# Altium PCB GbE_Interface_Adapter.PcbDoc (part 2 of 2)
Units mm, origin at the board's own origin, x right, y up, seen from the top; angles counter-clockwise.
Board outline 70.72 x 41.02 mm, 4 copper layers (Top Layer, GND, PWR/GND, Bottom Layer), stack 1.583 mm thick; 95 components, 56 nets, 318 pads, 400 vias.
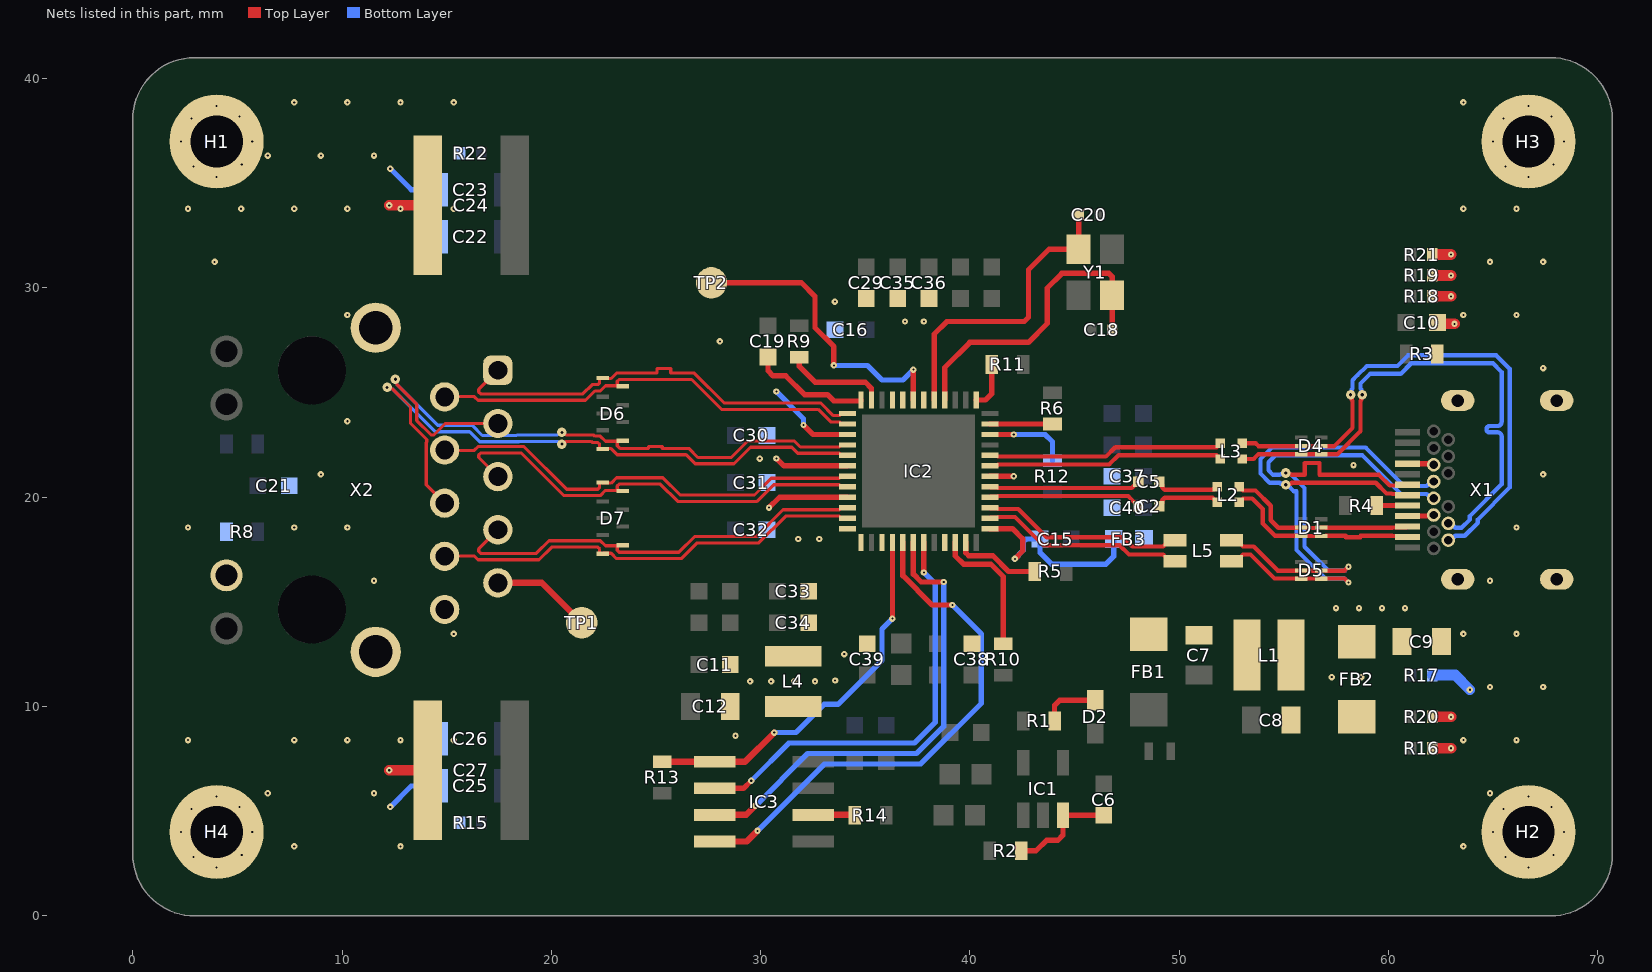
[diagram p4: the nets of this part, all layers, seen from the top]

## Via types
v1: diameter 0.305, hole 0.102, Top Layer to Bottom Layer, tented both sides, 391 vias
v2: diameter 0.457, hole 0.152, Top Layer to Bottom Layer, tented both sides, 9 vias

## Nets (pads, with @x,y where several pads share a name; then routed paths per layer and width w, separated by ;. In a path a pad name is that pad's centre, name@x,y a point inside that pad or via, vN(x,y) a via of type N, cw(c..) or ccw(c..) an arc to the next point about the centre after c; other vN are vias at no path point) (continued)
NetC6_2: C6.2 IC1.3 R2.1 | length 5.2
  Top Layer w0.254: R2.1@42.45,3.1 43.161,3.1 43.662,3.6 44.2,3.6 44.45,3.85 IC1.3@44.45,4.8 C6.2@46.4,4.8
NetC7_2: C7.2 FB1.2 L1.1
NetC8_2: C8.2 FB2.1 L1.2
NetC15_2: C15.2 FB3.1 IC2.25 | length 10.1
  Top Layer w0.254: IC2.25@40.954,18.5 42.039,18.5 42.531,18.008 42.531,17.431 v1(42.15,17.05)
  Bottom Layer w0.254: v1(42.15,17.05) 42.55,17.45 42.55,17.851 42.699,18 C15.2@43.35,18 43.35,17.35 43.9,16.8 46.5,16.8 46.875,17.175 FB3.1@46.875,18
NetC18_1: C18.1 IC2.40 Y1.1 | length 15
  Top Layer w0.254: IC2.40@38.8,24.654 38.8,26.2 40,27.4 42.8,27.4 43.7,28.3 43.7,30 44.4,30.7 46.651,30.7 46.8,30.551 Y1.1@46.8,29.65 C18.1@46.8,28
NetC19_2: C19.2 IC2.48 | length 5.8
  Top Layer w0.254: C19.2@30.35,26.7 30.35,26.05 30.6,25.8 31.2,25.8 32.1,24.9 33.2,24.9 33.5,24.6 34.8,24.6 IC2.48@34.8,24.654
NetC20_1: C20.1 IC2.41 Y1.3 | length 14.7
  Top Layer w0.254: IC2.41@38.3,24.654 38.3,27.8 38.9,28.4 42.6,28.4 42.8,28.6 42.8,30.87 43.78,31.85 Y1.3@45.2,31.85 C20.1@45.2,33.5
NetD2_2: D2.2 R1.1 | length 2.8
  Top Layer w0.254: R1.1@44.05,9.305 44.05,10.05 44.3,10.3 D2.2@46,10.3
NetIC2_17: IC2.17 IC3.4 | length 25.3
  Top Layer w0.254: IC2.17@36.8,17.846 36.8,16.251 38.201,14.85 v1(39.163,14.85)
  Top Layer w0.305: IC3.4@27.8,3.545 29.345,3.545 v1(29.85,4.05)
  Bottom Layer w0.254: v1(29.85,4.05) 33.05,7.25 37.65,7.25 40.55,10.15 40.55,13.463 v1(39.163,14.85)
NetIC2_18: IC2.18 IC3.3 | length 22.7
  Top Layer w0.254: IC2.18@37.3,17.846 37.3,16.325 37.675,15.95 v1(38.75,15.95)
  Top Layer w0.305: IC3.3@27.8,4.815 29.315,4.815 v1(29.75,5.25)
  Bottom Layer w0.254: v1(29.75,5.25) 32.25,7.75 37.45,7.75 38.756,9.056 38.756,15.944 v1(38.75,15.95)
NetIC2_19: IC2.19 IC3.2 | length 20.7
  Top Layer w0.254: IC3.2@27.8,6.085 29.185,6.085 v1(29.55,6.45) ; v1(37.8,16.4) IC2.19@37.8,17.846
  Bottom Layer w0.254: v1(29.55,6.45) 31.35,8.25 37.35,8.25 38.35,9.25 38.35,15.85 v1(37.8,16.4)
NetR4_2: R4.2 X1.A5 | length 1.5
  Top Layer w0.254: R4.2@59.45,19.6 X1.A5@60.92,19.6
NetR5_1: IC2.23 R5.1 | length 4.2
  Top Layer w0.254: IC2.23@39.8,17.846 39.8,17.349 39.949,17.2 41.103,17.2 41.853,16.45 R5.1@43.1,16.45
NetR6_1: IC2.35 R6.1 | length 3
  Top Layer w0.254: IC2.35@40.954,23.5 R6.1@43.95,23.5
NetR8_2: R8.2 X2.P13
NetR9_1: IC2.47 R9.1 | length 4.9
  Top Layer w0.254: R9.1@31.85,26.7 31.85,26.249 32.599,25.5 35.003,25.5 35.3,25.203 IC2.47@35.3,24.654
NetR13_2: IC2.16 IC3.1 R13.2 | length 18.4
  Top Layer w0.254: v1(36.3,14.2) IC2.16@36.3,17.846
  Top Layer w0.305: R13.2@25.3,7.355 IC3.1@27.8,7.355 29.255,7.355 v1(30.65,8.75)
  Bottom Layer w0.254: v1(30.65,8.75) 31.691,8.75 33.041,10.1 33.7,10.1 35.8,12.2 35.8,13.7 v1(36.3,14.2)
NetR14_2: IC3.6 R14.2 | length 2
  Top Layer w0.305: IC3.6@32.524,4.815 R14.2@34.5,4.815
PHY_AVDD: TP1.TP X2.P9 | length 4.8
  Top Layer w0.305: X2.P9@17.44,15.905 19.545,15.905 TP1.TP@21.45,14
PME_MODE: IC2.43 TP2.TP | length 14.6
  Top Layer w0.254: TP2.TP@27.65,30.25 31.95,30.25 32.6,29.6 32.6,28.1 33.5,27.2 v1(33.5,26.3) ; IC2.43@37.3,24.654 v1(37.3,26.1)
  Bottom Layer w0.254: v1(33.5,26.3) 35.1,26.3 35.8,25.6 36.8,25.6 v1(37.3,26.1)
PME_N/CONNECT: IC2.22 R10.2 | length 6.6
  Top Layer w0.254: IC2.22@39.3,17.846 39.3,17.2 39.7,16.8 41,16.8 41.6,16.2 R10.2@41.6,13
SHIELD: C21.1 C22.2 C23.2 C24.2 C25.2 C26.2 C27.2 H1.H H4.H R15.2 R22.2 X2.P10 X2.S1 X2.S2 | length 9.1
  Top Layer w0.508: v1(12.248,6.95) C27.2@14.098,6.95 ; v1(12.25,33.95) C24.2@14.1,33.95
  Bottom Layer w0.254: v1(12.3,5.2) 13.3,6.2 C25.2@14.6,6.2 ; v1(12.3,35.7) 13.3,34.7 C23.2@14.6,34.7
  other v1: 4,2.3 2.9,2.8 5.2,2.9 7.71,3.31 12.79,3.31 2.3,4 5.7,4 2.8,5.1 5.1,5.2 4,5.7 6.44,5.85 11.52,5.85 2.63,8.39 7.71,8.39 10.25,8.39 12.79,8.39 15.33,8.39 15.33,13.47 11.52,16.01 2.63,18.55 7.71,18.55 10.25,18.55 8.98,21.09 10.25,23.63 10.25,28.71 3.9,31.25 2.63,33.79 5.17,33.79 7.71,33.79 10.25,33.79 12.79,33.79 15.33,33.79 4,35.3 2.9,35.8 5.2,35.9 6.44,36.33 8.98,36.33 11.52,36.33 2.3,37 5.7,37 2.8,38.1 5.1,38.2 4,38.7 7.71,38.87 10.25,38.87 12.79,38.87 15.33,38.87
SHIELD_USB: C9.1 C10.1 H2.H H3.H R3.1 R16.1 R17.1 R18.1 R19.1 R20.2 R21.2 X1.SH1 X1.SH2 X1.SH3 X1.SH4 | length 7.5
  Top Layer w0.508: R16.1@62.1,8 v1(63,8) ; R20.2@62.1,9.5 v1(63,9.5) ; R18.1@62.1,29.6 v1(63,29.6) ; R19.1@62.1,30.6 v1(63,30.6) ; R21.2@62.1,31.6 v1(63,31.6) ; C10.1@62.266,28.284 v1(63.166,28.284)
  Bottom Layer w0.508: R17.1@62.1,11.5 63.2,11.5 v1(63.9,10.8)
  other v1: 66.7,2.3 65.6,2.8 67.9,2.9 63.59,3.31 65,4 68.4,4 65.5,5.1 67.8,5.2 66.7,5.7 64.86,5.85 63.59,8.39 66.13,8.39 64.86,10.93 67.4,10.93 63.59,13.47 66.13,13.47 64.86,16.01 66.13,18.55 67.4,21.09 67.4,26.17 63.59,28.71 66.13,28.71 64.86,31.25 67.4,31.25 63.59,33.79 66.13,33.79 66.7,35.3 65.6,35.8 67.9,35.9 65,37 68.4,37 65.5,38.1 67.8,38.2 66.7,38.7 63.59,38.87
TEST: IC2.34 R12.2 | length 4
  Top Layer w0.254: IC2.34@40.954,23 v1(42.1,23)
  Bottom Layer w0.254: v1(42.1,23) 43.6,23 43.95,22.65 R12.2@43.95,21.75
TR0_N: D6.9 IC2.2 X2.P2 | length 21
  Top Layer w0.152: X2.P2@14.9,24.795 14.915,24.81 16.311,24.81 16.49,24.632 21.63,24.632 22.076,25.078 22.341,25.078 22.587,25.324 D6.9@23.176,25.324 ; D6.9@23.4,25.3 23.2,25.3 D6.9@23.176,25.324 ; IC2.2@34.146,23.5 33.867,23.5 33.769,23.598 33.351,23.598 32.748,24.2 28.131,24.2 26.702,25.629 23.238,25.629 23.149,25.539 23.149,25.413 23.176,25.386 D6.9@23.176,25.324
TR0_P: D6.1 IC2.1 X2.P1 | length 21
  Top Layer w0.152: X2.P1@17.44,26.065 16.527,25.152 16.527,25.026 16.616,24.936 21.504,24.936 21.95,25.383 22.215,25.383 22.304,25.472 22.304,25.676 22.328,25.7 D6.1@22.45,25.7 22.474,25.676 22.855,25.676 23.112,25.933 24.97,25.933 25.046,25.933 25.046,26.158 25.707,26.158 25.707,25.933 25.937,25.933 26.829,25.933 28.257,24.505 32.874,24.505 33.477,23.902 33.769,23.902 33.867,24 IC2.1@34.146,24
TR1_N: D6.5 IC2.5 X2.P6 | length 31.1
  Top Layer w0.152: v2(12.147,25.247) 12.206,25.189 12.385,25.189 13.263,24.311 13.263,23.534 14.037,22.76 14.037,22.634 14.022,22.619 14.022,20.593 X2.P6@14.9,19.715 ; v2(20.5,22.541) 20.582,22.541 20.709,22.668 21.899,22.668 21.95,22.617 22.215,22.617 22.304,22.528 22.304,22.324 22.328,22.3 D6.5@22.45,22.3 22.474,22.324 22.855,22.324 23.148,22.03 26.439,22.03 26.874,21.595 28.726,21.595 29.516,22.384 31.485,22.384 31.772,22.098 33.769,22.098 33.867,22 IC2.5@34.146,22
  Bottom Layer w0.152: v2(12.147,25.247) 12.206,25.189 12.385,25.189 14.442,23.133 16.088,23.133 16.574,22.647 18.456,22.647 18.477,22.668 20.291,22.668 20.418,22.541 v2(20.5,22.541)
TR1_P: D6.6 IC2.4 X2.P3 | length 31
  Top Layer w0.152: v2(12.543,25.643) 12.601,25.584 12.601,25.405 13.568,24.437 13.568,23.66 14.253,22.975 14.379,22.975 14.929,23.525 X2.P3@17.44,23.525 ; v2(20.5,23.1) 20.582,23.1 20.709,22.973 22.026,22.973 22.076,22.922 22.341,22.922 22.587,22.676 D6.6@23.176,22.676 ; D6.6@23.4,22.7 23.2,22.7 D6.6@23.176,22.676 ; IC2.4@34.146,22.5 33.867,22.5 33.769,22.402 31.899,22.402 31.612,22.689 29.389,22.689 28.6,21.9 27.052,21.9 27,21.9 26.565,22.335 26.215,22.335 26.036,22.335 25.299,22.335 25.299,22.431 24.639,22.431 24.639,22.335 24.4,22.335 23.274,22.335 23.149,22.461 23.149,22.587 23.176,22.614 D6.6@23.176,22.676
  Bottom Layer w0.152: v2(12.543,25.643) 12.601,25.584 12.601,25.405 14.568,23.438 16.214,23.438 16.7,22.952 18.33,22.952 18.351,22.973 20.291,22.973
TR2_N: D7.9 IC2.8 X2.P5 | length 21.3
  Top Layer w0.152: X2.P5@17.44,20.985 16.527,21.898 16.527,22.024 16.616,22.114 18.565,22.114 20.601,20.078 22.341,20.078 22.587,20.324 D7.9@23.176,20.324 ; D7.9@23.4,20.3 23.2,20.3 D7.9@23.176,20.324 ; IC2.8@34.146,20.5 33.867,20.5 33.769,20.598 30.631,20.598 29.833,19.8 26.031,19.8 25.202,20.629 23.238,20.629 23.149,20.539 23.149,20.413 23.176,20.386 D7.9@23.176,20.324
TR2_P: D7.1 IC2.7 X2.P4 | length 21.3
  Top Layer w0.152: X2.P4@14.9,22.255 14.915,22.24 16.311,22.24 16.49,22.418 18.691,22.418 20.727,20.383 22.215,20.383 22.304,20.472 22.304,20.676 22.328,20.7 D7.1@22.45,20.7 22.474,20.676 22.855,20.676 23.112,20.933 25.329,20.933 26.157,20.105 29.707,20.105 30.504,20.902 33.769,20.902 33.867,21 IC2.7@34.146,21
TR3_N: D7.5 IC2.11 X2.P8 | length 20.8
  Top Layer w0.152: X2.P8@14.9,17.175 14.915,17.19 16.311,17.19 16.49,17.012 19.406,17.012 20.012,17.617 22.215,17.617 22.304,17.528 22.304,17.324 22.328,17.3 D7.5@22.45,17.3 22.474,17.324 22.855,17.324 23.112,17.067 26.215,17.067 26.964,17.815 29.913,17.815 31.196,19.098 33.769,19.098 33.867,19 IC2.11@34.146,19
TR3_P: D7.6 IC2.10 X2.P7 | length 20.8
  Top Layer w0.152: X2.P7@17.44,18.445 16.527,17.532 16.527,17.406 16.616,17.316 19.28,17.316 19.886,17.922 22.341,17.922 22.587,17.676 D7.6@23.176,17.676 ; D7.6@23.4,17.7 23.2,17.7 D7.6@23.176,17.676 ; IC2.10@34.146,19.5 33.867,19.5 33.769,19.402 31.069,19.402 29.787,18.12 26.837,18.12 26.089,17.371 23.238,17.371 23.149,17.461 23.149,17.587 23.176,17.614 D7.6@23.176,17.676
USB2D1_N: D5.2 D5.5 L5.4 X1.A7 X1.B7 | length 30.1
  Top Layer w0.203: L5.4@52.5,17.95 52.75,17.95 53.059,17.641 53.567,17.641 54.717,16.491 55.644,16.491 55.653,16.5 D5.5@55.85,16.5 56.047,16.5 56.056,16.491 56.594,16.491 56.603,16.5 D5.2@56.8,16.5 56.997,16.5 57.006,16.491 57.916,16.491 v1(58.1,16.675) ; 55.344,21.11 55.384,21.07 55.9,21.07 56.002,21.07 56.002,21.639 56.713,21.639 56.713,21.07 57.5,21.07 59.556,21.07 60.071,20.555 60.875,20.555 X1.A7@60.92,20.6
  Bottom Layer w0.203: v1(58.1,16.675) 57.916,16.491 57.143,16.491 56,17.633 56,20.439 55.329,21.11 55.149,21.11 v2(55.1,21.159) 55.051,21.11 54.856,21.11 54.816,21.07 54.488,21.07 54.269,21.288 54.269,21.669 54.6,22 58.761,22 60.602,20.16 61.84,20.16 62.049,19.95 X1.B7@62.17,19.95
USB2D1_P: D5.1 D5.6 L5.1 X1.A6 X1.B6 | length 30.2
  Top Layer w0.203: L5.1@52.5,16.95 52.75,16.95 53.06,17.26 53.409,17.26 54.559,16.11 55.644,16.11 55.653,16.1 D5.6@55.85,16.1 56.047,16.1 56.056,16.11 56.594,16.11 56.603,16.1 D5.1@56.8,16.1 56.997,16.1 57.006,16.11 57.916,16.11 v1(58.1,15.925) ; 55.344,20.649 55.384,20.689 59.398,20.689 59.914,20.174 60.165,20.174 60.191,20.148 60.872,20.148 X1.A6@60.92,20.1
  Bottom Layer w0.203: v1(58.1,15.925) 57.916,16.11 56.985,16.11 55.619,17.475 55.619,20.281 55.488,20.281 55.169,20.6 v2(55.1,20.6) 55.051,20.649 54.856,20.649 54.816,20.689 54.33,20.689 53.888,21.131 53.888,21.827 54.442,22.381 58.919,22.381 60.759,20.541 61.84,20.541 62.049,20.75 X1.B6@62.17,20.75
USB2D_N: IC2.27 L5.3 | length 9.7
  Top Layer w0.203: IC2.27@40.954,19.5 40.979,19.475 41.309,19.475 41.343,19.441 42.314,19.441 43.674,18.081 47.321,18.081 47.762,17.641 49.24,17.641 49.55,17.95 L5.3@49.8,17.95
USB2D_P: IC2.26 L5.2 | length 9.7
  Top Layer w0.203: IC2.26@40.954,19 40.979,19.025 41.309,19.025 41.343,19.06 42.157,19.06 43.516,17.7 47.163,17.7 47.604,17.26 49.24,17.26 49.55,16.95 L5.2@49.8,16.95
USB3RX1_N: D4.2 D4.5 L3.4 X1.B11 | length 25.8
  Top Layer w0.203: L3.4@53.025,22.575 53.666,22.575 53.8,22.441 55.644,22.441 55.653,22.45 D4.5@55.85,22.45 56.047,22.45 56.056,22.441 56.594,22.441 56.603,22.45 D4.2@56.8,22.45 56.997,22.45 57.016,22.431 57.405,22.431 58.289,23.315 58.289,24.616 58.249,24.656 58.249,24.851 v2(58.2,24.9)
  Bottom Layer w0.203: 58.249,25.144 58.289,25.184 58.289,25.591 58.511,25.813 58.975,26.277 60.438,26.277 60.942,26.781 65.158,26.781 65.8,26.139 65.8,20.46 64.281,18.941 64.281,18.783 63.658,18.16 63.2,18.16 62.991,17.95 X1.B11@62.87,17.95
USB3RX1_P: D4.1 D4.6 L3.1 X1.B10 | length 25.7
  Top Layer w0.203: L3.1@53.025,21.825 53.565,21.825 53.8,22.06 55.644,22.06 55.653,22.05 D4.6@55.85,22.05 56.047,22.05 56.056,22.06 56.594,22.06 56.603,22.05 D4.1@56.8,22.05 57.563,22.05 58.67,23.157 58.67,24.616 58.71,24.656 58.71,24.851 v2(58.759,24.9)
  Bottom Layer w0.203: 58.71,25.144 58.67,25.184 58.67,25.433 59.133,25.896 60.596,25.896 61.1,26.4 65,26.4 65.419,25.981 65.419,24.623 65.419,23.607 cw(c65.216,23.607) 65.216,23.404 64.844,23.404 ccw(c64.844,23.252) 64.844,23.099 65.216,23.099 cw(c65.216,22.896) 65.419,22.896 65.419,22.177 65.419,20.618 63.9,19.099 63.9,18.941 63.5,18.541 63.2,18.541 62.991,18.75 X1.B10@62.87,18.75
USB3RX_N: IC2.32 L3.3 | length 11.3
  Top Layer w0.203: IC2.32@40.954,22 40.979,21.975 41.309,21.975 41.343,21.941 46.502,21.941 46.952,22.39 51.79,22.39 L3.3@51.975,22.575
USB3RX_P: IC2.31 L3.2 | length 11.3
  Top Layer w0.203: IC2.31@40.954,21.5 40.979,21.525 41.309,21.525 41.343,21.56 46.66,21.56 47.109,22.009 51.79,22.009 L3.2@51.975,21.825
USB3TX1_N: D1.2 D1.5 L2.4 X1.A3 | length 9.3
  Top Layer w0.203: L2.4@52.875,20.5 53.059,20.316 53.658,20.316 54.381,19.592 54.381,18.9 54.741,18.541 55.644,18.541 55.653,18.55 D1.5@55.85,18.55 56.047,18.55 56.066,18.531 56.376,18.531 56.584,18.531 56.603,18.55 D1.2@56.8,18.55 56.997,18.55 57.006,18.541 60.179,18.541 60.191,18.552 60.872,18.552 X1.A3@60.92,18.6
USB3TX1_P: D1.1 D1.6 L2.1 X1.A2 | length 9.2
  Top Layer w0.203: L2.1@52.875,19.75 53.059,19.935 53.5,19.935 54,19.435 54,18.742 54.583,18.16 55.644,18.16 55.653,18.15 D1.6@55.85,18.15 56.218,18.15 D1.1@56.602,18.15 ; D1.1@56.8,18.15 56.997,18.15 57.006,18.16 57.153,18.16 57.966,18.16 57.966,18.084 58.677,18.084 58.677,18.16 58.902,18.16 60.179,18.16 60.191,18.148 60.872,18.148 X1.A2@60.92,18.1
USB3TX2_N: C5.1 L2.3 | length 3.1
  Top Layer w0.203: C5.1@49.05,20.75 49.198,20.602 49.198,20.472 49.317,20.353 51.583,20.353 51.606,20.377 51.702,20.377 L2.3@51.825,20.5
USB3TX2_P: C2.1 L2.2 | length 3.1
  Top Layer w0.203: C2.1@49.05,19.575 49.198,19.723 49.198,19.853 49.317,19.972 51.603,19.972 L2.2@51.825,19.75
USB3TX_N: C5.2 IC2.29 | length 7.2
  Top Layer w0.203: IC2.29@40.954,20.5 40.979,20.475 41.309,20.475 41.343,20.441 47.74,20.441 C5.2@48.05,20.75
USB3TX_P: C2.2 IC2.28 | length 7.3
  Top Layer w0.203: IC2.28@40.954,20 40.979,20.025 41.309,20.025 41.343,20.06 47.565,20.06 C2.2@48.05,19.575
USERBIAS: IC2.37 R11.2 | length 2.3
  Top Layer w0.254: IC2.37@40.3,24.654 40.3,24.65 40.75,24.65 41.05,24.95 R11.2@41.05,26.35
VBUS: C9.2 FB2.2 X1.A4 X1.A9 X1.B4 X1.B9 | length 2.5
  Top Layer w0.254: X1.A4@60.92,19.1 62.12,19.1 X1.B9@62.17,19.15 ; X1.A9@60.92,21.6 62.12,21.6 X1.B4@62.17,21.55
  other v1: 57.3,11.4 58.7,11.4 57.5,14.7 58.6,14.7 59.7,14.7 60.8,14.7 58.336,21.536
VDD12: C11.2 C12.2 C35.2 C36.2 C37.2 C38.2 C39.2 C40.2 FB3.2 IC2.15 IC2.21 IC2.30 IC2.42 IC2.44 L4.2 | length 1.1
  Top Layer w0.254: IC2.30@40.954,21 v1(42.1,21)
  other v1: 28.8,8.6 29.5,11.2 30.5,11.2 31.6,11.2 32.6,11.2 33.563,11.237 34,12.5 36.9,28.4 37.8,28.4
VDD12_SW_OUT: IC2.13 L4.1
VDD25: C16.2 C29.2 C30.2 C31.2 C32.2 C33.2 C34.2 IC2.3 IC2.6 IC2.9 IC2.12 IC2.45 | length 11.9
  Top Layer w0.254: v1(30.4,19.5) 30.9,20 IC2.9@34.146,20 ; v1(30.75,21.85) 30.764,21.85 31.114,21.5 IC2.6@34.146,21.5 ; v1(32.05,23.45) 32.5,23 IC2.3@34.146,23
  Bottom Layer w0.254: v1(30.75,25.05) 32.05,23.75 v1(32.05,23.45)
  other v1: 31.8,18 32.8,18 29.956,21.845 28.05,27.45 33.55,29.35
pads on no net: D1.4 D4.4 D5.4 D6.2 D6.4 D6.7 D6.8 D7.2 D7.4 D7.7 D7.8 IC1.4 IC3.7 X1.A8 X1.A10 X1.A11 X1.B2 X1.B3 X1.B5 X1.B8 X2.MH1 X2.MH2 X2.P11

## Polygon pours and split planes (outlines as drawn)
GND on Bottom Layer "GND_L04_P005" (solid, remove dead copper, pour order 5): 16.4,13.1 17.1,13.8 17.1,15.1 15.9,16.3 14.493,16.3 11.5,19.293 11.5,25.1 16.4,30 16.4,41 61.4,41 61.4,24.471 62.329,24.471 63.8,23 63.8,17.9 63.449,17.549 62.544,17.549 61.305,16.311 61.305,15.395 61.998,14.702 61.998,14.098 61.5,13.6 61.5,0 16.4,0
SHIELD_USB on Bottom Layer "SHIELD_USB_L04_P002" (solid, remove dead copper, pour order 2): 61.6,0 61.6,13.7 62.1,14.2 62.1,14.8 61.4,15.5 61.4,16.3 62.6,17.5 63.6,17.5 64,17.9 64,23 62.4,24.6 61.8,24.6 61.8,41 67.848,41 cw(c67.848,38.46) 69.644,40.256 69.956,39.944 cw(c68.16,38.148) 70.7,38.148 70.7,2.752 cw(c68.16,2.752) 69.956,0.956 69.744,0.744 cw(c67.948,2.54) 67.948,0
SHIELD on Bottom Layer "SHIELD_L04_P000" (solid, remove dead copper, pour order 0): 16.2,41 2.752,41 ccw(c2.752,38.46) 0.956,40.256 0.744,40.044 ccw(c2.54,38.248) 0,38.248 0,2.752 ccw(c2.54,2.752) 0.744,0.956 1.1,0.6 ccw(c2.549,2.049) 2.549,0 16.2,0 16.2,13.2 16.9,13.9 16.9,15 15.7,16.2 14.4,16.2 11.3,19.3 11.3,25.2 16.2,30.1
GND on Top Layer "GND_L01_P006" (solid, remove dead copper, pour order 6): 15.592,13.108 16.292,13.808 16.292,15.108 15.092,16.308 13.685,16.308 10.692,19.302 10.692,25.108 15.592,30.008 15.592,41.008 60.592,41.008 60.592,24.479 61.421,24.479 62.6,23.3 62.6,17.506 60.497,15.403 61.19,14.71 61.19,14.107 60.692,13.608 60.692,0.008 15.592,0.008
SHIELD_USB on Top Layer "SHIELD_USB_L01_P003" (solid, remove dead copper, pour order 3): 61.6,0 61.6,13.7 62.1,14.2 62.1,14.8 61.4,15.5 61.4,16.1 62.5,17.2 63.3,17.2 64,17.9 64,23 62.4,24.6 61.8,24.6 61.8,41 67.848,41 cw(c67.848,38.46) 69.644,40.256 69.956,39.944 cw(c68.16,38.148) 70.7,38.148 70.7,2.752 cw(c68.16,2.752) 69.956,0.956 69.744,0.744 cw(c67.948,2.54) 67.948,0
SHIELD on Top Layer "SHIELD_L01_P001" (solid, remove dead copper, pour order 1): 16.2,41 2.752,41 ccw(c2.752,38.46) 0.956,40.256 0.744,40.044 ccw(c2.54,38.248) 0,38.248 0,2.752 ccw(c2.54,2.752) 0.744,0.956 1.1,0.6 ccw(c2.549,2.049) 2.549,0 16.2,0 16.2,13.2 16.9,13.9 16.9,15 15.7,16.2 14.4,16.2 11.3,19.3 11.3,25.2 16.2,30.1
GND on PWR/GND (split plane): 2.95,40.501 67.75,40.501 67.766,40.503 67.964,40.494 68.176,40.466 68.385,40.42 68.589,40.355 68.787,40.273 68.977,40.175 69.157,40.06 69.327,39.929 69.485,39.785 69.629,39.627 69.76,39.457 69.875,39.277 69.973,39.087 70.055,38.889 70.12,38.685 70.166,38.476 70.194,38.264 70.203,38.066 70.201,38.05 70.201,2.95 70.203,2.934 70.194,2.736 70.166,2.524 70.12,2.315 70.055,2.111 69.973,1.913 69.875,1.723 69.76,1.543 69.629,1.373 69.485,1.215 69.327,1.071 69.157,0.94 68.977,0.825 68.787,0.727 68.589,0.645 68.385,0.58 68.176,0.534 67.964,0.506 67.766,0.497 67.75,0.499 2.95,0.499 2.934,0.497 2.736,0.506 2.524,0.534 2.315,0.58 2.111,0.645 1.913,0.727 1.723,0.825 1.543,0.94 1.373,1.071 1.215,1.215 1.071,1.373 0.94,1.543 0.825,1.723 0.727,1.913 0.645,2.111 0.58,2.315 0.534,2.524 0.506,2.736 0.497,2.934 0.499,2.95 0.499,38.05 0.497,38.066 0.506,38.264 0.534,38.476 0.58,38.685 0.645,38.889 0.727,39.087 0.825,39.277 0.94,39.457 1.071,39.627 1.215,39.785 1.373,39.929 1.543,40.06 1.723,40.175 1.913,40.273 2.111,40.355 2.315,40.42 2.524,40.466 2.736,40.494 2.934,40.503
VDD12 on PWR/GND (split plane): 38.296,30.8 38.296,25 38.304,24.96 38.327,24.927 38.36,24.904 38.4,24.896 41.257,24.896 42.496,23.657 42.496,20.404 40.452,20.404 40.452,24.05 40.444,24.089 40.422,24.122 40.389,24.144 40.35,24.152 36.502,24.152 36.502,26.092 36.504,26.1 36.504,27.1 36.496,27.14 36.484,27.156 36.473,27.173 36.355,27.292 36.355,30.8 36.347,30.84 36.324,30.873 36.291,30.896 36.251,30.904 28.2,30.904 28.16,30.896 28.127,30.873 26.127,28.873 26.104,28.84 26.096,28.8 26.096,18.493 25.227,17.623 25.204,17.59 25.196,17.55 25.196,12.75 25.204,12.71 25.227,12.677 25.26,12.654 25.3,12.646 33.35,12.646 33.39,12.654 33.423,12.677 33.446,12.71 33.454,12.75 33.454,13.096 35.246,13.096 35.246,10.104 29.55,10.104 29.51,10.096 29.477,10.073 29.454,10.04 29.446,10 29.446,8.404 25.443,8.404 24.604,9.243 24.604,30.057 26.393,31.846 38.296,31.846
+5V on PWR/GND (split plane): 49.798,1.702 39.802,1.702 39.802,5.198 45.7,5.198 45.739,5.206 45.772,5.228 45.794,5.261 45.802,5.3 45.802,11.998 49.798,11.998
VDD25 on PWR/GND (split plane): 34.196,28.504 33.3,28.504 33.26,28.496 33.227,28.473 33.204,28.44 33.196,28.4 33.196,17.554 29.552,17.554 29.552,25.05 29.544,25.089 29.522,25.122 27.502,27.142 27.502,27.808 29.491,29.796 34.196,29.796
+3V3 on PWR/GND (split plane): 42.798,28.7 42.806,28.661 42.828,28.628 46.698,24.758 46.698,24.4 46.698,16.045 44.357,13.704 39.25,13.704 39.21,13.696 39.177,13.673 39.154,13.64 39.146,13.6 39.146,12.15 39.154,12.11 39.177,12.077 39.21,12.054 39.25,12.046 43.196,12.046 43.196,6.304 32.304,6.304 32.304,9.396 36.9,9.396 36.94,9.404 36.973,9.427 36.996,9.46 37.004,9.5 37.004,14.7 36.996,14.74 36.973,14.773 36.94,14.796 36.9,14.804 36.892,14.802 34.702,14.802 34.702,16.092 34.704,16.1 34.696,16.14 34.673,16.173 34.64,16.196 34.6,16.204 27.7,16.204 27.66,16.196 27.627,16.173 27.357,15.904 26.054,15.904 26.054,17.496 27.257,17.496 27.777,16.977 27.794,16.966 27.81,16.954 27.85,16.946 44,16.946 44.04,16.954 44.073,16.977 44.096,17.01 44.104,17.05 44.104,24.9 44.096,24.94 44.084,24.956 44.073,24.973 41.304,27.743 41.304,30.198 42.798,30.198
SHIELD on GND (split plane): 2.95,40.501 15.948,40.501 15.948,30.204 11.122,25.378 11.082,25.326 11.056,25.265 11.048,25.2 11.048,19.3 11.056,19.235 11.082,19.174 11.122,19.122 14.222,16.022 14.274,15.982 14.335,15.956 14.4,15.948 15.596,15.948 16.648,14.896 16.648,14.004 16.022,13.378 15.982,13.326 15.956,13.265 15.948,13.2 15.948,0.499 2.95,0.499 2.934,0.497 2.736,0.506 2.524,0.534 2.315,0.58 2.111,0.645 1.913,0.727 1.723,0.825 1.543,0.94 1.373,1.071 1.215,1.215 1.071,1.373 0.94,1.543 0.825,1.723 0.727,1.913 0.645,2.111 0.58,2.315 0.534,2.524 0.506,2.736 0.497,2.934 0.499,2.95 0.499,38.05 0.497,38.066 0.506,38.264 0.534,38.476 0.58,38.685 0.645,38.889 0.727,39.087 0.825,39.277 0.94,39.457 1.071,39.627 1.215,39.785 1.373,39.929 1.543,40.06 1.723,40.175 1.913,40.273 2.111,40.355 2.315,40.42 2.524,40.466 2.736,40.494 2.934,40.503
SHIELD_USB on GND (split plane): 67.964,40.494 68.176,40.466 68.385,40.42 68.589,40.355 68.787,40.273 68.977,40.175 69.157,40.06 69.327,39.929 69.485,39.785 69.629,39.627 69.76,39.457 69.875,39.277 69.973,39.087 70.055,38.889 70.12,38.685 70.166,38.476 70.194,38.264 70.203,38.066 70.201,38.05 70.201,2.95 70.203,2.934 70.194,2.736 70.166,2.524 70.12,2.315 70.055,2.111 69.973,1.913 69.875,1.723 69.76,1.543 69.629,1.373 69.485,1.215 69.327,1.071 69.157,0.94 68.977,0.825 68.787,0.727 68.589,0.645 68.385,0.58 68.176,0.534 67.964,0.506 67.766,0.497 67.75,0.499 61.852,0.499 61.852,13.596 62.278,14.022 62.318,14.074 62.344,14.135 62.352,14.2 62.352,14.8 62.344,14.865 62.326,14.908 62.318,14.926 62.301,14.949 62.278,14.978 61.652,15.604 61.652,15.996 62.604,16.948 63.3,16.948 63.365,16.956 63.426,16.982 63.478,17.022 64.178,17.722 64.218,17.774 64.244,17.835 64.252,17.9 64.252,22.7 64.244,22.765 64.218,22.826 64.178,22.878 63.378,23.678 63.326,23.718 63.265,23.744 63.2,23.752 62.604,23.752 61.852,24.504 61.852,40.501 67.75,40.501 67.766,40.503
GND on GND (split plane): 61.348,24.4 61.356,24.335 61.382,24.274 61.422,24.222 62.322,23.322 62.344,23.304 62.374,23.282 62.435,23.256 62.5,23.248 63.096,23.248 63.748,22.596 63.748,18.004 63.196,17.452 62.5,17.452 62.435,17.444 62.374,17.418 62.344,17.396 62.322,17.378 61.222,16.278 61.182,16.226 61.156,16.165 61.148,16.1 61.148,15.5 61.156,15.435 61.182,15.374 61.222,15.322 61.848,14.696 61.848,14.304 61.422,13.878 61.382,13.826 61.356,13.765 61.348,13.7 61.348,0.499 16.452,0.499 16.452,13.096 17.078,13.722 17.118,13.774 17.144,13.835 17.152,13.9 17.152,15 17.144,15.065 17.118,15.126 17.096,15.156 17.078,15.178 15.878,16.378 15.826,16.418 15.765,16.444 15.7,16.452 14.504,16.452 11.552,19.404 11.552,25.096 16.378,29.922 16.396,29.944 16.418,29.974 16.444,30.035 16.452,30.1 16.452,40.501 61.348,40.501

## Keep-outs
Keep-Out Layer:
  lines w0.3: -0.011,2.95 ccw(c2.95,2.95) 2.95,-0.011 67.75,-0.011 ccw(c67.75,2.95) 70.711,2.95 70.711,38.05 ccw(c67.75,38.05) 67.75,41.011 2.95,41.011 ccw(c2.95,38.05) -0.011,38.05 -0.011,2.95
  lines w1.2: -0.011,2.95 ccw(c2.95,2.95) 2.95,-0.011 67.75,-0.011 ccw(c67.75,2.95) 70.711,2.95 70.711,38.05 ccw(c67.75,38.05) 67.75,41.011 2.95,41.011 ccw(c2.95,38.05) -0.011,38.05 -0.011,2.95

## Other copper
Top Layer:
  region net +3V3: 34,6.2 35.2,6.2 35.35,6.35 35.35,9.65 35.25,9.75 34.15,9.75 33.95,9.55 33.95,8.25 33.65,7.95 31.45,7.95 31.35,7.85 31.35,6.75 31.45,6.65 33.75,6.65 33.85,6.55 33.85,6.35
  region net VBUS: 61.514,21.739 61.517,21.736 61.517,21.4 58.1,21.4 58,21.5 58,21.9 58.1,22 60.073,22 60.336,21.737 61.508,21.737
  region net GND: 46,30.1 45.744,30.356 44.436,30.356 44.083,30.002 44.083,27.644 44.676,27.051 47.76,27.051 48.15,27.442 48.15,33.767 47.65,34.268 45.957,34.268 45.813,34.125 45.813,32.987 46.1,32.7 46.1,31.21 46.21,31.1 47.2,31.1 47.529,30.771 47.529,28.829 47.3,28.6 47.3,27.8 47.1,27.6 46.5,27.6 46.3,27.8 46.3,28.7 46,29
  pour cut-out: 43.96,27.545 44.551,26.954 47.868,26.954 48.272,27.357 48.272,33.862 47.744,34.389 44.348,34.389 43.96,34.001
  region net VDD12: 38.7,28.6 38.7,30.2 38.6,30.3 36,30.3 35.9,30.2 35.9,28.7 36.05,28.55 36.671,27.929 36.671,24.241 36.936,24.241 36.936,26.236 37.1,26.4 37.1,27.934 37.166,28 37.447,28 37.5,27.947 37.5,26.4 37.676,26.224 37.676,24.241 37.931,24.241 37.931,27.831 38.324,28.224
  region net +5V: 49.1,8.2 49.9,9 49.9,11.8 49.6,12.1 47.2,12.1 46.9,11.8 46.9,7.9 47.5,7.3 47.5,4 46.8,3.3 43.8,3.3 43,2.5 42.1,2.5 41.9,2.7 41.9,3.5 42.1,3.7 42.757,3.7 42.9,3.843 42.9,5.6 39.93,5.6 39.7,5.37 39.7,1.8 40,1.5 48.8,1.5 49.1,1.8 49.1,7.8
  region net +3V3: 39.1,13.7 39.9,14.5 39.9,15.64 38.46,17.08 38.46,18.3 38.118,18.3 38.118,17.047 39.5,15.665 39.5,14.7 39.3,14.5 38.8,14.5 38.2,13.9 38.094,13.9 38.094,14.606 37.9,14.8 37.1,14.8 36.9,14.6 36.9,13.9 36.1,13.9 35.9,13.7 35.9,12.8 36,12.7 39,12.7 39.1,12.8
  region net NetC8_2: 59.4,10.5 59.6,10.3 59.6,8.7 59.4,8.5 54.6,8.5 54.4,8.7 54.4,14.2 54.6,14.4 56.1,14.4 56.3,14.2 56.3,10.9 56.7,10.5
  region net VBUS: 60.8,15.2 57.3,15.2 56.8,14.7 56.8,11.1 57,10.9 59.5,10.9 59.8,11.2 59.8,11.9 60.1,12.2 60.9,12.2 61.047,12.347 61.047,14.953
  region net VDD25: 28.4,28.1 27.6,28.1 27.3,27.8 27.3,27.4 29.8,24.9 30.994,24.9 31.1,25.006 31.1,25.186 30.986,25.3 30.2,25.3 29.7,25.8 29.7,26.8
  region net VDD25: 34.8,28.8 35.1,28.5 36.045,27.555 36.045,26.755 36.148,26.652 36.148,24.24 36.454,24.24 36.454,27.938 35.7,28.692 35.7,29.8 35.4,30.1 33.061,30.1 32.95,29.989 32.95,28.95 33.1,28.8
  region net +3V3: 35.1,18.233 35.1,15.159 35.159,15.1 35.431,15.1 35.501,15.17 35.501,18.235 35.436,18.3 35.167,18.3
  region net VDD12_SW_OUT: 30.2,13.1 30,12.9 30,12 30.2,11.8 32.9,11.8 33,11.9 33,12.6 34.9,14.5 34.9,18.254 34.621,18.254 34.621,16.521 33.3,15.2 33.3,13.6 32.8,13.1
  region net VDD12: 28.05,8.25 29.55,8.25 29.65,8.35 29.65,9.45 33.35,9.45 33.55,9.65 33.55,10.35 33.75,10.55 34.05,10.55 34.25,10.75 34.25,11.85 34.5,12.1 40.7,12.1 40.75,12.15 40.75,13.55 40.75,15.85 40.1,16.5 39.642,16.5 38.952,17.191 38.952,18.3 38.637,18.3 38.637,17.176 40.1,15.713 40.1,14.2 39.55,13.65 39.4,13.5 39.4,12.6 39.2,12.4 36.058,12.4 35.75,12.708 35.75,13.85 35.966,14.066 35.966,18.257 35.923,18.3 35.698,18.3 35.648,18.251 35.648,14.948 33.25,12.55 33.25,11.55 29.75,11.55 29.65,11.65 29.65,12.45 29.55,12.55 28.05,12.55 27.95,12.45 27.95,8.35
  region net +3V3: 45,24.4 45.4,24 45.4,22.5 45.6,22.3 46.2,22.3 46.4,22.5 46.4,25.3 46.2,25.5 45.4,25.5 43.4,25.5 43.3,25.4 43.3,24.7 42.727,24.127 40.55,24.127 40.55,23.874 43.174,23.874 43.7,24.4
  region net +3V3: 43.15,12.15 45.3,14.3 45.3,16.9 45.1,17.1 44.2,17.1 44,16.9 44,16.1 42.3,14.4 42.3,12.4 42.1,12.2 41.1,12.2 40.95,12.05 40.95,9.45 40.25,9.45 39.95,9.15 39.95,6.45 40.2,6.2 42.8,6.2 43.15,6.55 43.15,12.05
  region net VDD25: 34.1,18.4 34.6,18.4 34.6,18.7 31.7,18.7 31.5,18.5 31.5,13.6 31.75,13.35 32.85,13.35 33.1,13.6 33.1,17.4
  region net +3V3: 42.3,30 39.2,30 39.1,29.9 39.1,29.1 39.2,29 42.3,29 42.4,29.1 42.4,29.9
  region net NetC7_2: 47.45,12.35 47.25,12.55 47.25,14.45 47.45,14.65 53.95,14.65 54.15,14.45 54.15,10.75 53.95,10.55 52.45,10.55 52.25,10.75 52.25,12.15 52.05,12.35
  region net GND: 28.05,16.15 28.05,13.35 31.25,13.35 31.25,16.15
  region net +3V3: 27.65,17.05 27.65,13.35 26.45,13.35 26.45,17.05
Bottom Layer:
  region net VBUS: 56.7,11.2 57,10.9 59.3,10.9 59.6,11.2 59.6,12.2 60,12.6 61.2,12.6 61.5,12.9 61.5,14.8 60.3,16 60.3,18.3 60.99,18.99 62.354,18.99 62.424,19.061 62.424,19.216 62.34,19.3 61,19.3 59,19.3 59,21.4 58.669,21.731 58.166,21.731 58,21.565 58,19.2 59.2,18 59.2,15.2 57.3,15.2 56.7,14.6
  region net VDD12: 46.1,19 46.25,18.85 47.15,18.85 47.65,18.35 47.65,17.35 48.85,17.35 48.85,18.65 48.05,18.65 47.45,19.25 47.45,21.55 46.15,21.55 45.8,21.2 41.7,21.2 41.6,21.1 41.6,20.8 41.7,20.7 45.6,20.7 46.1,20.2
  region net SHIELD: 15.845,4.146 14.354,4.146 14.17,4.33 14.17,6.903 14.266,7 15,7 15.066,6.934 15.066,5.113 15.422,4.757 15.843,4.757 15.9,4.7 15.9,4.2
  region net SHIELD: 15.845,36.754 14.354,36.754 14.17,36.57 14.17,33.997 14.266,33.9 15,33.9 15.066,33.966 15.066,35.787 15.422,36.143 15.843,36.143 15.9,36.2 15.9,36.7
  region net +3V3: 6.3,22 6.4,22.1 6.4,23.1 6.35,23.15 5.45,23.15 5.35,23.05 5.35,17.95 5.45,17.85 6.25,17.85 6.3,17.9 6.3,18.8 6.2,18.9 5.988,18.9 5.988,22
  region net +3V3: 36.2,13.7 36.1,13.6 36.1,12.6 36.2,12.5 37.9,12.5 38,12.6 38,15.3 36.6,16.7 35.1,16.7 34.9,16.5 34.9,15.2 35.1,15 36.5,15 36.9,14.6 36.9,13.9 36.7,13.7
  region net LED3: 3.25,25.45 3.55,25.75 5.35,25.75 5.65,25.45 5.65,23.95 4.95,23.25 4.95,22.05 3.95,22.05 3.95,23.25 3.25,23.95
  region net GND: 47.7,25.3 47.7,19.2 47.9,19 48.7,19 48.9,19.2 48.9,25.3 48.7,25.5 47.9,25.5
  region net VDD25: 33.1,27.6 34,27.6 34.15,27.75 34.15,30.15 34,30.3 29.9,30.3 27.3,27.7 27.3,27 27.5,26.8 28.5,26.8 28.7,27 28.7,28.5 29.7,29.5 32.3,29.5 32.95,28.85 32.95,27.75
  region net +3V3: 42.289,30.2 39,30.2 39,25.3 39.2,25.1 40.202,25.1 40.459,25.357 40.459,27.559 41.7,28.8 42.3,28.8 42.4,28.9 42.4,30.089
  region net VDD25: 29.65,23.55 29.65,17.85 30.95,17.85 30.95,23.55
  region net +3V3: 34.95,9.55 32.85,9.55 32.65,9.35 32.65,8.75 32.85,8.55 34.95,8.55
  region net +3V3: 45.95,21.95 47.35,21.95 47.35,24.65 45.95,24.65 45.55,24.25 45.55,22.35
  region net NetR8_2: 5.5,15.5 5.15,15.15 3.75,15.15 3.4,15.5 3.4,16.9 3.99,17.49 3.99,18.85 4.99,18.85 4.99,17.41 5.5,16.9
GND (plane layer: these items are gaps in the copper):
  lines w0.5: 16.2,41 16.2,30.1 11.3,25.2 11.3,19.3 14.4,16.2 15.7,16.2 16.9,15 16.9,13.9 16.2,13.2 16.2,0 16.3,0 ; 61.6,0 61.6,13.7 62.1,14.2 62.1,14.8 61.4,15.5 61.4,16.1 62.5,17.2 63.3,17.2 64,17.9 64,22.7 63.2,23.5 62.5,23.5 61.6,24.4 61.6,41
PWR/GND (plane layer: these items are gaps in the copper):
  lines w0.2: 29.45,17.45 29.45,25.05 27.4,27.1 27.4,27.85 29.45,29.9 ; 34.6,16.1 34.6,14.7 36.9,14.7 ; 36.4,26.1 36.4,24.05 40.35,24.05 40.35,20.3 ; 41.2,30 41.2,30.3 42.9,30.3 42.9,28.7 46.8,24.8 46.8,24.4 46.8,16 ; 39.7,1.6 39.7,5.3 45.7,5.3 45.7,12.1 49.9,12.1 49.9,1.6 39.7,1.6
  lines w0.203: 29.45,17.45 33.3,17.45 33.3,28.4 34.3,28.4 34.3,29.9 29.45,29.9 ; 34.6,16.1 27.7,16.1 27.4,15.8 25.95,15.8 25.95,17.6 27.3,17.6 27.85,17.05 44,17.05 44,24.9 41.2,27.7 41.2,30.3 ; 36.4,26.1 36.4,27.1 36.251,27.249 36.251,30.8 28.2,30.8 26.2,28.8 26.2,18.45 25.3,17.55 25.3,12.75 29.35,12.75 33.35,12.75 33.35,13.2 34.3,13.2 35.3,13.2 35.35,13.15 35.35,10 29.55,10 29.55,8.3 25.4,8.3 24.5,9.2 24.5,30.1 26.35,31.95 38.4,31.95 38.4,30.8 38.4,25 41.3,25 42.6,23.7 42.6,20.3 40.35,20.3 ; 36.9,14.7 36.9,9.5 32.2,9.5 32.2,6.2 43.3,6.2 43.3,12.15 39.25,12.15 39.25,13.6 44.4,13.6 46.8,16

## Silkscreen, mask and mechanical layers (free items; w line width, h text height)
Top Overlay:
  drawing of 24 lines, arcs and shapes, not listed